# Altium PCB PCB11.ST_LINK Lyalina Veronika.PcbDoc
Units mm, origin at the board's own origin, x right, y up, seen from the top; angles counter-clockwise.
Board outline 124.21 x 96.27 mm, 2 copper layers (Top Layer, Bottom Layer); 68 components, 53 nets, 201 pads, 16 vias.
Unrouted connection lines stored in the file: 23.
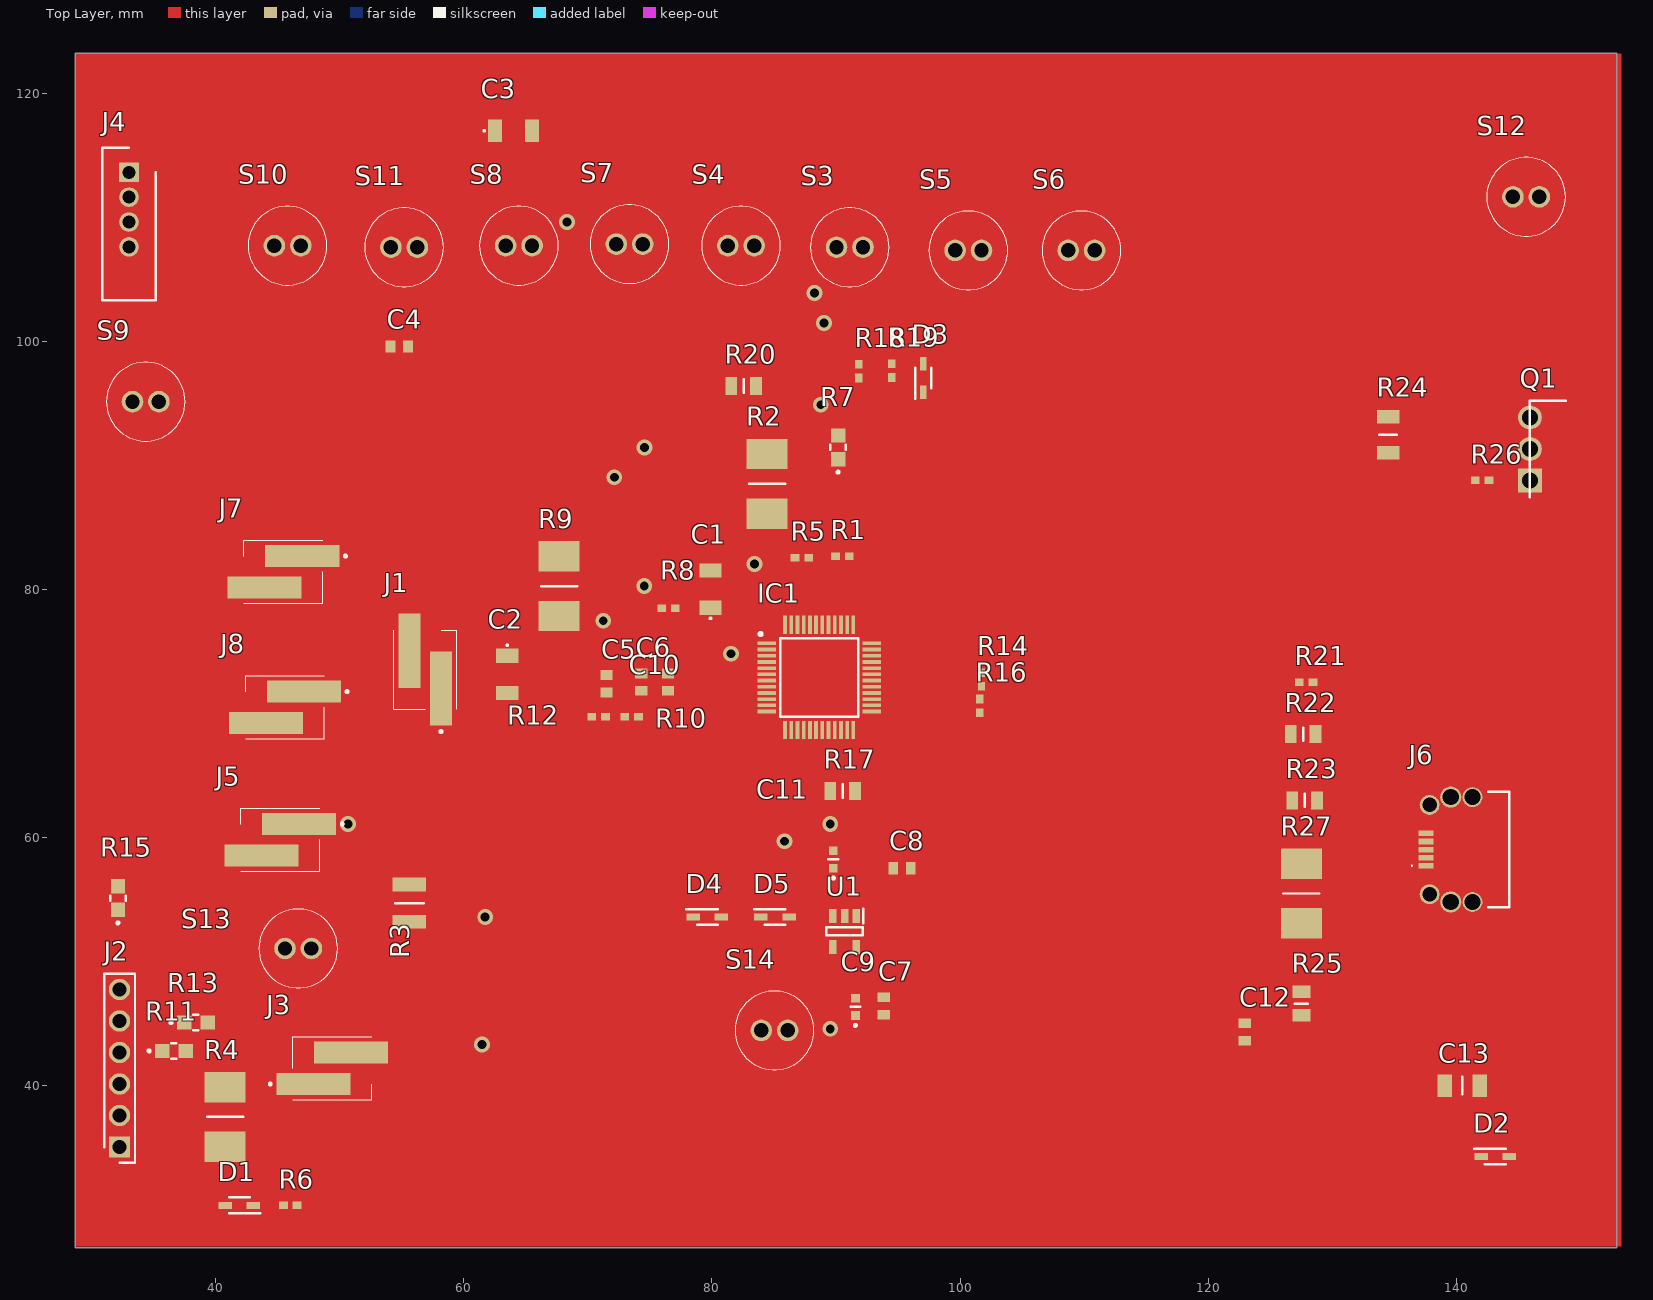
[diagram p0: Top Layer view]
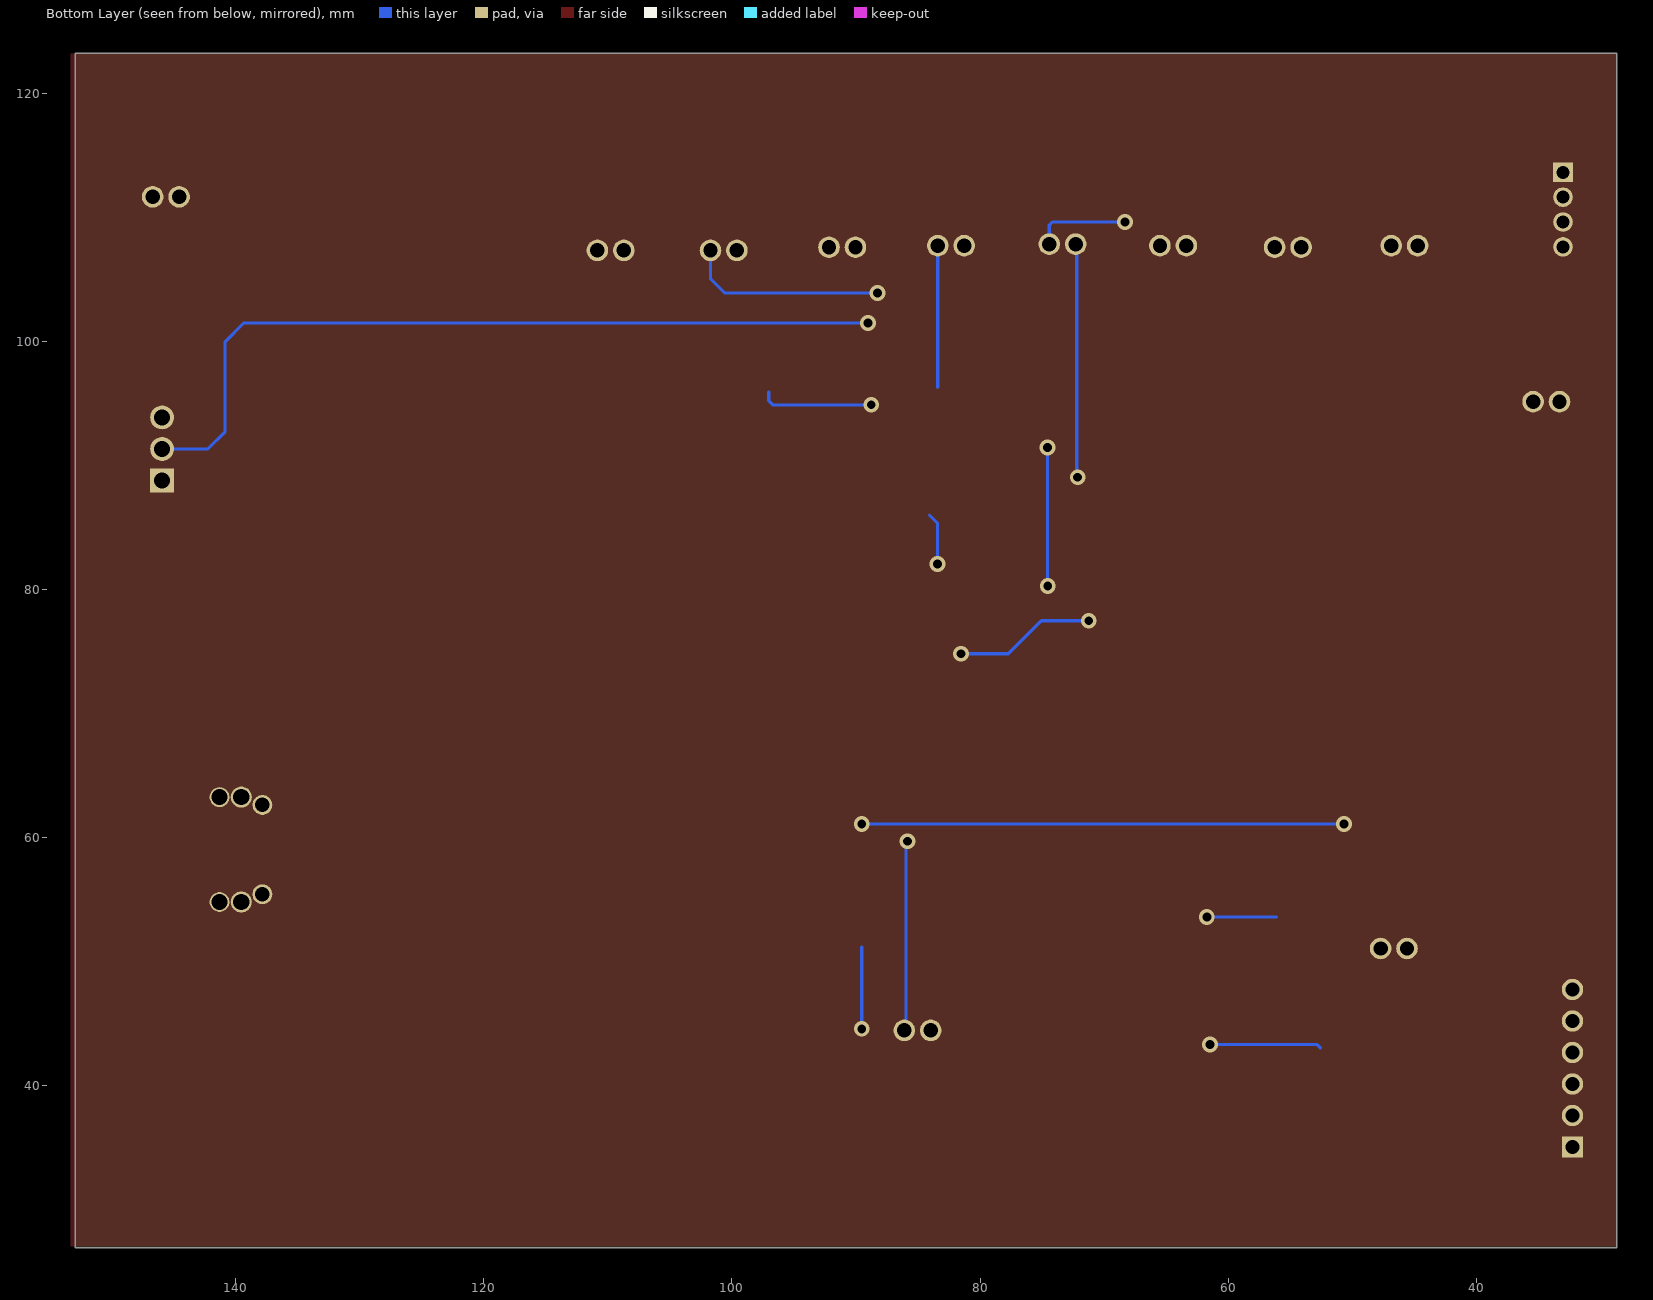
[diagram p1: Bottom Layer view, seen from below]
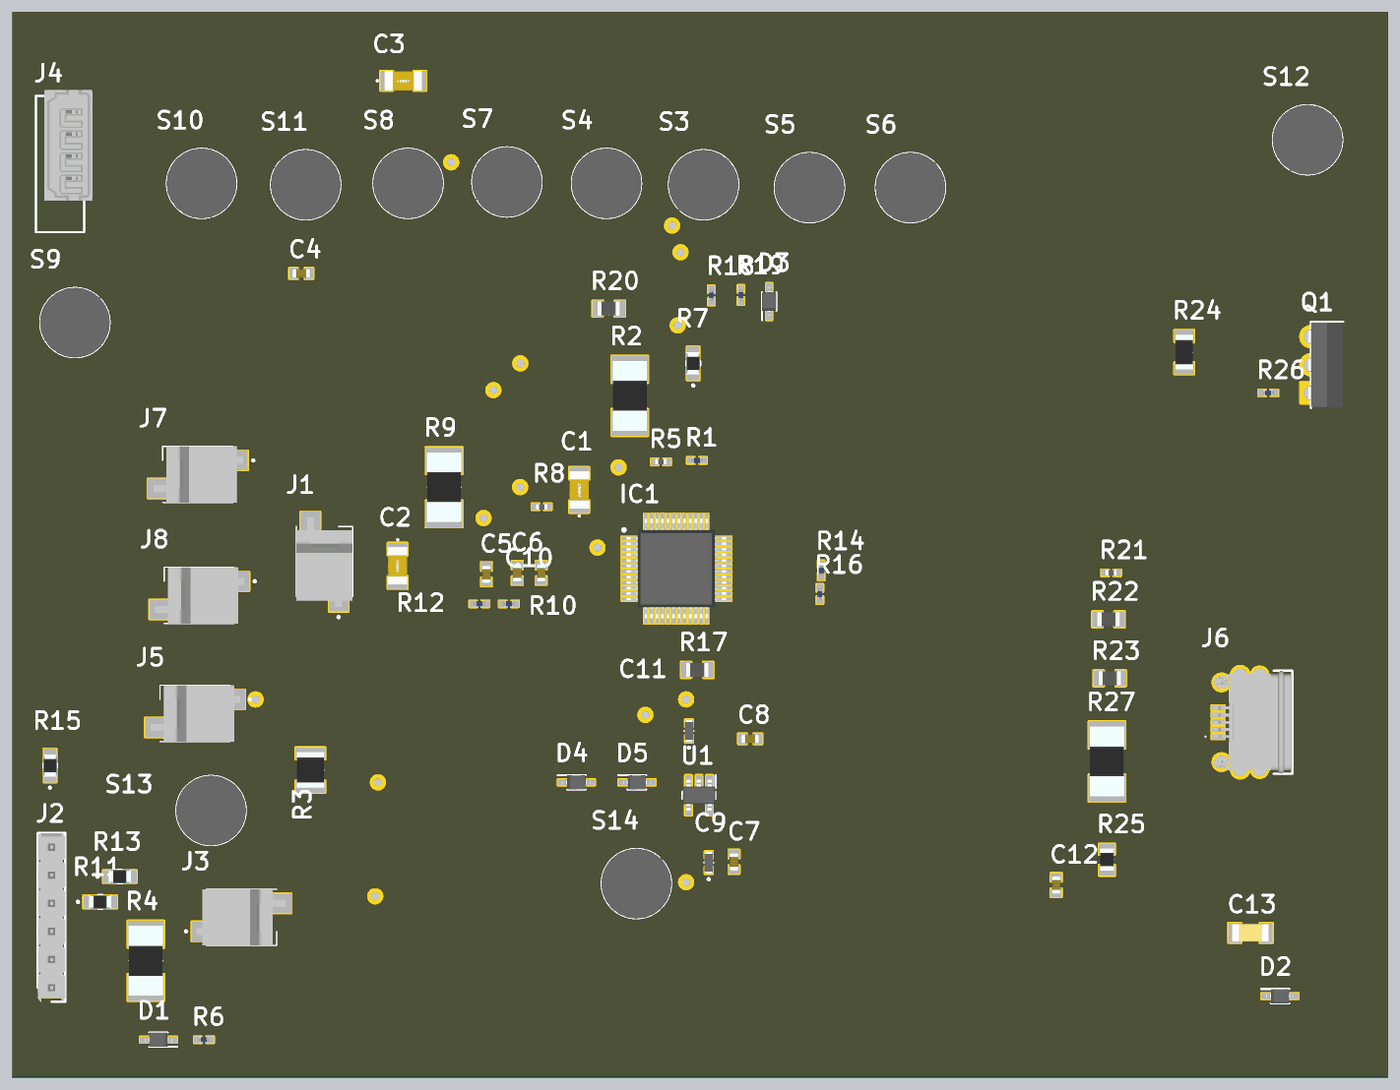
[diagram p2: 3D render of the assembled board from above, using the file's embedded part models]

## Layer stack, top to bottom
Top Solder: solder mask 0.0102, Solder Resist, Dk 3.5
Top Layer: signal copper 0.0356
Dielectric 1: dielectric 0.32, FR-4, Dk 4.8
Bottom Layer: signal copper 0.0356
Bottom Solder: solder mask 0.0102, Solder Resist, Dk 3.5

## Board outline
28.702,26.924 28.702,123.19 152.908,123.19 152.908,26.924

## Design rules (kind name [scope] priority, off if disabled: settings)
Clearance [All] p1: gap=0.254 ignorepadtopadclearanceinfootprint=FALSE
PolygonConnect [All] p1: connectstyle=Relief reliefconductorwidth=0.254 reliefentries=4 polygonreliefangle="90 Angle" airgapwidth=0.254
RoutingVias [All] p1: holewidth=0.711 width=1.27 viastyle="Through Hole" minholewidth=0.711 minwidth=1.27 maxholewidth=0.711 maxwidth=1.27
SolderMaskExpansion [All] p1: expansion=0.102 istentingtop=FALSE
Width [All] p1: maxlimit=0.254 minlimit=0.254 preferedwidth=0.254
30 further rules are at their usual default settings.

## Components (designator, comment, footprint, x,y, rotation, side; value= is the part's Value field where it differs from the comment)
C1 "C1206C200KCGACTU" C1206 79.883,80.01 r90 top
C2 "C1206C200KCGACTU" C1206 63.5,73.152 r270 top
C3 "C1206C200KCGACTU" C1206 64.008,116.967 r0 top
C4 "06035C104K4T4A" CAPC1608X90N 54.799,99.568 r0 top
C5 "06035C104K4T4A" CAPC1608X90N 71.501,72.39 r270 top
C6 "06035C104K4T4A" CAPC1608X90N 74.295,72.517 r270 top
C7 "06035C104K4T4A" CAPC1608X90N 93.853,46.417 r90 top
C8 "06035C104K4T4A" CAPC1608X90N 95.315,57.531 r0 top
C9 "MAJCT168BB7105KTEA01" MAJx16 91.567,46.355 r90 top
C10 "06035C104K4T4A" CAPC1608X90N 76.454,72.517 r270 top
C11 "MAJCT168BB7105KTEA01" MAJx16 89.789,58.231 r90 top
C12 "06035C104K4T4A" CAPC1608X90N 122.936,44.323 r90 top
C13 "KGM31GCG2J103JU" CAPC3316X145N 140.462,40.005 r0 top
D1 "BAT60JFILM" SOD2513X117N 41.91,30.353 r180 top
D2 "BAT60JFILM" SOD2513X117N 143.129,34.29 r0 top
D3 "BAT60JFILM" SOD2513X117N 97.028,97.028 r90 top
D4 "BAT60JFILM" SOD2513X117N 79.629,53.594 r0 top
D5 "BAT60JFILM" SOD2513X117N 85.087,53.594 r0 top
IC1 "STM32F103CBT6" QFP50P900X900X160-48N 88.646,72.898 r0 top
J1 "3-647166-2" 36471662 56.896,73.529 r0 top
J2 "22-28-4062" HDRV6W66P0X254_1X6_1524X249X838P 32.258,35.052 r90 top
J3 "3-647166-2" 36471662 49.403,41.402 r270 top
J4 "53014-0410" SHDR4W60P0X200_1X4_1200X435X1000P 33.02,113.601 r90 top
J5 "3-647166-2" 36471662 45.208,59.817 r90 top
J6 "204926-1103" 2049261103 140.766,59.025 r90 top
J7 "3-647166-2" 36471662 45.462,81.407 r90 top
J8 "3-647166-2" 36471662 45.593,70.485 r90 top
Q1 "BD139" TO254P290X760X1320-3P 145.923,88.773 r90 top
R1 "MCS04020D4701BE000" RESC1005X37N 90.509,82.677 r180 top
R2 "CRM2512QJW-103ELF" RESC6331X80N 84.455,88.506 r270 top
R3 "CRCW12102K70FKEAHP" RESC3225X70N 55.626,54.713 r90 top
R4 "CRM2512QJW-103ELF" RESC6331X80N 40.767,37.478 r90 top
R5 "SFR01MZPF1003" RESC1005X40N 87.249,82.55 r0 top
R6 "MCS04020C1000FE000" RESC1005X37N 46.016,30.353 r0 top
R7 "ERA-6AHD220V" ERA6AEB1020V 90.17,91.44 r90 top
R8 "SFR01MZPF1003" RESC1005X40N 76.496,78.486 r180 top
R9 "CRM2512QJW-103ELF" RESC6331X80N 67.691,80.251 r270 top
R10 "MCS04020D4701BE000" RESC1005X37N 73.533,69.723 r180 top
R11 "ERA-6AHD220V" ERA6AEB1020V 36.642,42.799 r0 top
R12 "MCS04020D4701BE000" RESC1005X37N 70.866,69.723 r0 top
R13 "ERA-6AHD220V" ERA6AEB1020V 38.415,45.085 r0 top
R14 "MCS04020C1000FE000" RESC1005X37N 101.727,72.729 r90 top
R15 "ERA-6AHD220V" ERA6AEB1020V 32.131,55.118 r90 top
R16 "MCS04020C1000FE000" RESC1005X37N 101.6,70.612 r90 top
R17 "WSL080500000ZEA9" RESC2013X84N 90.535,63.754 r0 top
R18 "MCS04020C1000FE000" RESC1005X37N 91.821,97.578 r90 top
R19 "MCS04020C1000FE000" RESC1005X37N 94.488,97.621 r90 top
R20 "WSL080500000ZEA9" RESC2013X84N 82.55,96.393 r0 top
R21 "SFR01MZPF1003" RESC1005X40N 127.889,72.517 r0 top
R22 "WSL080500000ZEA9" RESC2013X84N 127.651,68.326 r0 top
R23 "WSL080500000ZEA9" RESC2013X84N 127.762,62.992 r0 top
R24 "CRCW12061K50FKEAHP" RESC3116X65N 134.493,92.456 r90 top
R25 "TNPW080536K0BEEA" RESC2012X55N 127.508,46.609 r90 top
R26 "MCS04020C1000FE000" RESC1005X37N 142.071,88.773 r180 top
R27 "CRM2512QJW-103ELF" RESC6331X80N 127.508,55.486 r270 top
S3 "8631CQD2" 8631CQD2 90.043,107.569 r0 top
S4 "8631CQD2" 8631CQD2 81.28,107.696 r0 top
S5 "8631CQD2" 8631CQD2 99.597,107.315 r0 top
S6 "8631CQD2" 8631CQD2 108.712,107.315 r0 top
S7 "8631CQD2" 8631CQD2 72.292,107.823 r0 top
S8 "8631CQD2" 8631CQD2 63.373,107.696 r0 top
S9 "8631CQD2" 8631CQD2 35.433,95.123 r180 top
S10 "8631CQD2" 8631CQD2 44.733,107.696 r0 top
S11 "8631CQD2" 8631CQD2 54.131,107.569 r0 top
S12 "8631CQD2" 8631CQD2 144.555,111.633 r0 top
S13 "8631CQD2" 8631CQD2 45.593,51.054 r0 top
S14 "8631CQD2" 8631CQD2 83.976,44.45 r0 top
U1 "LD3985M33R" SOT95P280X145-5N 90.687,52.43 r270 top

## Footprints (in the part's own frame and the unit in brackets; to place one, negate y for a bottom-side part, rotate by r counter-clockwise, add the part's x,y. Pads: shape width x height; smd on the part's side, far side on the other; paste and mask are expansions set on the pad)
8631CQD2 [mm]
  round 1.74 hole 1.16: 1(0,0) 2(2.13,0)
  silkscreen extent -2.11,-3.17 4.24,3.17, body extent -2.11,-3.17 4.24,3.17, height 14.03
36471662 [mm]
  rect 1.78x5.97 smd: 1(1.27,-1.52) 2(-1.27,1.52)
  silkscreen extent -2.54,-5.1 2.54,3.17, body extent -2.54,-4.08 2.54,4, height 10.55
2049261103 [mm]
  rect 0.45x1.2 smd: 1(-1.3,3.225) 2(-0.65,3.225) 3(0,3.225) 4(0.65,3.225) 5(1.3,3.225)
  round 1.6 hole 1.17: MH1(-3.6,2.925) MH2(3.6,2.925)
  round 1.7 hole 1.3: MH3(-4.225,1.225) MH4(4.225,1.225)
  round 1.6 hole 1.3: MH5(-4.225,-0.525) MH6(4.225,-0.525)
  silkscreen extent -4.65,-3.47 4.65,4.4, body extent -4.65,-3.32 4.65,3.68, height 3.83
C1206 [mm]
  rect 1.15x1.8 smd: 1(-1.5,0) 2(1.5,0)
  silkscreen extent -2.4,-0.05 -2.3,0.05, body extent -1.7,-0.9 1.7,0.9, height 1.75
CAPC1608X90N [mm]
  rect 0.78x0.99 smd: 1(-0.7,0) 2(0.7,0)
  body extent -0.8,-0.41 0.8,0.41, height 0.9
CAPC3316X145N [mm]
  rect 1.17x1.82 smd: 1(-1.42,0) 2(1.42,0)
  silkscreen extent 0,-0.7 0,0.7, body extent -1.65,-0.8 1.65,0.8, height 1.68
ERA6AEB1020V [mm]
  rect 1.15x1.15 smd: 1(-0.95,0) 2(0.95,0)
  silkscreen extent -2.1,-0.63 0.2,0.63, body extent -1,-0.63 1,0.63, height 0.5
HDRV6W66P0X254_1X6_1524X249X838P [mm]
  rect 1.725x1.725 hole 1.15: 1(0,0)
  round 1.725 hole 1.15: 2(2.54,0) 3(5.08,0) 4(7.62,0) 5(10.16,0) 6(12.7,0)
  silkscreen extent -1.27,-1.24 13.97,1.24, body extent -1.27,-1.24 13.97,1.24, height 9.65
MAJx16 [mm]
  rect 0.7x0.7 smd: 1(-0.7,0) 2(0.7,0)
  silkscreen extent -1.6,-0.4 0,0.4, body extent -0.98,-0.4 0.98,0.4, height 0.9
QFP50P900X900X160-48N [mm]
  rect 1.475x0.3 smd: 1(-4.238,2.75) 2(-4.238,2.25) 3(-4.238,1.75) 4(-4.238,1.25) 5(-4.238,0.75) 6(-4.238,0.25) 7(-4.238,-0.25) 8(-4.238,-0.75) 9(-4.238,-1.25) 10(-4.238,-1.75) 11(-4.238,-2.25) 12(-4.238,-2.75) 25(4.238,-2.75) 26(4.238,-2.25) 27(4.238,-1.75) 28(4.238,-1.25) 29(4.238,-0.75) 30(4.238,-0.25) 31(4.238,0.25) 32(4.238,0.75) 33(4.238,1.25) 34(4.238,1.75) 35(4.238,2.25) 36(4.238,2.75)
  rect 0.3x1.475 smd: 13(-2.75,-4.238) 14(-2.25,-4.238) 15(-1.75,-4.238) 16(-1.25,-4.238) 17(-0.75,-4.238) 18(-0.25,-4.238) 19(0.25,-4.238) 20(0.75,-4.238) 21(1.25,-4.238) 22(1.75,-4.238) 23(2.25,-4.238) 24(2.75,-4.238) 37(2.75,4.238) 38(2.25,4.238) 39(1.75,4.238) 40(1.25,4.238) 41(0.75,4.238) 42(0.25,4.238) 43(-0.25,4.238) 44(-0.75,4.238) 45(-1.25,4.238) 46(-1.75,4.238) 47(-2.25,4.238) 48(-2.75,4.238)
  silkscreen extent -4.85,-3.15 3.15,3.62, body extent -4.5,-4.5 4.5,4.5, height 1.6
RESC1005X37N [mm]
  rect 0.7x0.6 smd: 1(-0.55,0) 2(0.55,0)
  body extent -0.5,-0.25 0.5,0.25, height 0.32
RESC1005X40N [mm]
  rect 0.7x0.6 smd: 1(-0.55,0) 2(0.55,0)
  body extent -0.5,-0.25 0.5,0.25, height 0.4
RESC2012X55N [mm]
  rect 1x1.45 smd: 1(-0.95,0) 2(0.95,0)
  silkscreen extent 0,-0.53 0,0.53, body extent -1,-0.63 1,0.63, height 0.55
RESC2013X84N [mm]
  rect 0.95x1.45 smd: 1(-1,0) 2(1,0)
  silkscreen extent 0,-0.54 0,0.54, body extent -1.01,-0.64 1.01,0.64, height 0.36
RESC3116X65N [mm]
  rect 1.1x1.8 smd: 1(-1.45,0) 2(1.45,0)
  silkscreen extent 0,-0.7 0,0.7, body extent -1.55,-0.8 1.55,0.8, height 0.65
RESC3225X70N [mm]
  rect 1.1x2.7 smd: 1(-1.5,0) 2(1.5,0)
  silkscreen extent 0,-1.15 0,1.15, body extent -1.6,-1.25 1.6,1.25, height 0.7
RESC6331X80N [mm]
  rect 2.45x3.3 smd: 1(-2.4,0) 2(2.4,0)
  silkscreen extent 0,-1.45 0,1.45, body extent -3.15,-1.55 3.15,1.55, height 0.8
SHDR4W60P0X200_1X4_1200X435X1000P [mm]
  rect 1.575x1.575 hole 1.05: 1(0,0)
  round 1.575 hole 1.05: 2(-2,0) 3(-4,0) 4(-6,0)
  silkscreen extent -10.3,-2.17 2,2.17, body extent -7.45,-2.96 2.55,1.39, height 5.85
SOD2513X117N [mm]
  rect 1.085x0.55 smd: 1(-1.14,0) 2(1.14,0)
  silkscreen extent -1.68,-0.64 0.83,0.64, body extent -1.25,-0.64 1.25,0.64, height 1.17
SOT95P280X145-5N [mm]
  rect 1.15x0.6 smd: 1(-1.25,0.95) 2(-1.25,0) 3(-1.25,-0.95) 4(1.25,-0.95) 5(1.25,0.95)
  silkscreen extent -1.83,-1.48 0.33,1.5, body extent -1.4,-1.48 1.4,1.48, height 1.45
TO254P290X760X1320-3P [mm]
  rect 1.92x1.92 hole 1.28: 1(0,0)
  round 1.92 hole 1.28: 2(2.54,0) 3(5.08,0)
  silkscreen extent -1.36,-2.9 6.44,0, body extent -1.26,-2.9 6.34,0.26, height 12.92

## Part data
C1 C2 C3: "Capacitor", Manufacturer_Name=KEMET, Datasheet Link=https://content.kemet.com/datasheets/KEM_C1009_C0G_HV_SMD.pdf, Manufacturer_Part_Number=C1206C200KCGACTU
C4 C5 C6 C7 C8 C10 C12: "Capacitor", Manufacturer_Name="Kyocera AVX", Mouser Part Number=581-06035C104K4T4A, Arrow Part Number=06035C104K4T4A, Arrow Price/Stock=https://www.arrow.com/en/products/06035c104k4t4a/avx, Datasheet Link=https://componentsearchengine.com/Datasheets/1/06031A100FAT2A.pdf, Height=0.9mm, Manufacturer_Part_Number=06035C104K4T4A, Mouser Price/Stock=https://www.mouser.co.uk/ProductDetail/KYOCERA-AVX/06035C104K4T4A?qs=NBj5Hwer2CEXBYKT%252BbuSBA%3D%3D
C9 C11: "Capacitor", Manufacturer_Name="TAIYO YUDEN", Datasheet Link=https://ds.yuden.co.jp/TYCOMPAS/or/detail?pn=MAJCT168BB7105KTEA01, Height=0.8mm, Manufacturer_Part_Number=MAJCT168BB7105KTEA01
C13: "Capacitor", Manufacturer_Name="Kyocera AVX", Mouser Part Number=581-KGM31GCG2J103JU, Datasheet Link=https://datasheets.kyocera-avx.com/HVKGM.pdf, Height=1.45mm, Manufacturer_Part_Number=KGM31GCG2J103JU, Mouser Price/Stock=https://www.mouser.co.uk/ProductDetail/KYOCERA-AVX/KGM31GCG2J103JU?qs=63Lh8XYXgjt6ivbLeGkCxg%3D%3D
D1 D2 D3 D4 D5: "Schottky Diode", Manufacturer_Name=STMicroelectronics, Mouser Part Number=511-BAT60JFILM, Arrow Part Number=BAT60JFILM, Arrow Price/Stock=https://www.arrow.com/en/products/bat60jfilm/stmicroelectronics?region=nac, Datasheet Link=https://www.mouser.jp/datasheet/2/389/cd00001944-1795661.pdf, Height=1.17mm, Manufacturer_Part_Number=BAT60JFILM, Mouser Price/Stock=https://www.mouser.co.uk/ProductDetail/STMicroelectronics/BAT60JFILM?qs=GnFZssByvVVVnMaukcyLZg%3D%3D
IC1: "Integrated Circuit", Manufacturer_Name=STMicroelectronics, Mouser Part Number=511-STM32F103CBT6, Arrow Part Number=STM32F103CBT6, Arrow Price/Stock=https://www.arrow.com/en/products/stm32f103cbt6/stmicroelectronics?region=europe, Datasheet Link=http://www.st.com/st-web-ui/static/active/en/resource/technical/document/datasheet/CD00161566.pdf, Height=1.6mm, Manufacturer_Part_Number=STM32F103CBT6, Mouser Price/Stock=https://www.mouser.co.uk/ProductDetail/STMicroelectronics/STM32F103CBT6?qs=WxFF5lh7QM3goh6GV5Ogig%3D%3D
J1 J3 J5 J7 J8: "Connector", Manufacturer_Name="TE Connectivity", Mouser Part Number=571-3-647166-2, Arrow Part Number=3-647166-2, Arrow Price/Stock=https://www.arrow.com/en/products/3-647166-2/te-connectivity?region=nac, Datasheet Link=https://www.te.com/commerce/DocumentDelivery/DDEController?Action=showdoc&DocId=Customer+Drawing%7F647166%7FR1%7Fpdf%7FEnglish%7FENG_CD_647166_R1.pdf%7F3-647166-2, Height=10.66mm, Manufacturer_Part_Number=3-647166-2, Mouser Price/Stock=https://www.mouser.co.uk/ProductDetail/TE-Connectivity/3-647166-2?qs=xsTFCgGnzbJU1qz6Np9kzA%3D%3D
J2: "Connector", Manufacturer_Name=Molex, Mouser Part Number=538-22-28-4062, Datasheet Link=https://datasheet.datasheetarchive.com/originals/distributors/SFDatasheet-1/sf-00031037.pdf, Height=8.38mm, Manufacturer_Part_Number=22-28-4062, Mouser Price/Stock=https://www.mouser.com/Search/Refine.aspx?Keyword=538-22-28-4062
J4: "Connector", Manufacturer_Name=Molex, Mouser Part Number=538-53014-0410, Datasheet Link=https://www.molex.com/pdm_docs/sd/530140410_sd.pdf, Height=10mm, Manufacturer_Part_Number=53014-0410, Mouser Price/Stock=https://www.mouser.co.uk/ProductDetail/Molex/53014-0410?qs=TLs3Kb%252BkMqKk8s1WRHwRGw%3D%3D
J6: "Connector", Manufacturer_Name=Molex, Mouser Part Number=538-204926-1103, Arrow Part Number=204926-1103, Arrow Price/Stock=https://www.arrow.com/en/products/204926-1103/molex?region=nac, Datasheet Link=https://www.molex.com/content/dam/molex/molex-dot-com/products/automated/en-us/salesdrawingpdf/204/204926/2049261103_sd.pdf, Height=4.65mm, Manufacturer_Part_Number=204926-1103, Mouser Price/Stock=https://www.mouser.co.uk/ProductDetail/Molex/204926-1103?qs=55YtniHzbhBOQihiQOeiLg%3D%3D
Q1: "Transistor BJT NPN", Manufacturer_Name=STMicroelectronics, Mouser Part Number=511-BD139, Arrow Part Number=BD139, Arrow Price/Stock=https://www.arrow.com/en/products/bd139/stmicroelectronics?region=europe, Datasheet Link=http://www.st.com/web/en/resource/technical/document/datasheet/CD00001225.pdf, Height=2.9mm, Manufacturer_Part_Number=BD139, Mouser Price/Stock=https://www.mouser.co.uk/ProductDetail/STMicroelectronics/BD139?qs=ljbEvF4DwOPW%2FLxHSWYMMA%3D%3D
R1 R10 R12: "Resistor", Manufacturer_Name=Vishay, Mouser Part Number=594-MCS04020D4701BE0, Datasheet Link=http://www.vishay.com/docs/28705/mcx0x0xpro.pdf, Height=0.37mm, Manufacturer_Part_Number=MCS04020D4701BE000, Mouser Price/Stock=https://www.mouser.co.uk/ProductDetail/Vishay-Beyschlag/MCS04020D4701BE000?qs=ft9OtscSA3%252BR0DpF5QqL2Q%3D%3D
R2 R4 R9 R27: "Resistor", Manufacturer_Name=Bourns, Mouser Part Number=652-CRM2512QJW-103E, Arrow Part Number=CRM2512QJW-103ELF, Arrow Price/Stock=https://www.arrow.com/en/products/crm2512qjw-103elf/bourns?region=nac, Datasheet Link=http://www.bourns.com/data/global/pdfs/CRM0805_1206_2010.pdf, Height=0.8mm, Manufacturer_Part_Number=CRM2512QJW-103ELF, Mouser Price/Stock=https://www.mouser.co.uk/ProductDetail/Bourns/CRM2512QJW-103ELF?qs=8Wlm6%252BaMh8Rzg3bRHdWGsA%3D%3D
R3: "Resistor", Manufacturer_Name=Vishay, Mouser Part Number=71-CRCW12102K70FKEAH, Datasheet Link=http://componentsearchengine.com/Datasheets/1/CRCW12102K70FKEAHP.pdf, Height=0.7mm, Manufacturer_Part_Number=CRCW12102K70FKEAHP, Mouser Price/Stock=https://www.mouser.co.uk/ProductDetail/Vishay-Dale/CRCW12102K70FKEAHP?qs=OAzHGkhREL0m0%252BU1n6AaAg%3D%3D
R5 R8 R21: "Resistor", Manufacturer_Name="ROHM Semiconductor", Mouser Part Number=755-SFR01MZPF1003, Datasheet Link=https://fscdn.rohm.com/en/products/databook/datasheet/passive/resistor/chip_resistor/sfr-e.pdf, Height=0.4mm, Manufacturer_Part_Number=SFR01MZPF1003, Mouser Price/Stock=https://www.mouser.co.uk/ProductDetail/ROHM-Semiconductor/SFR01MZPF1003?qs=Mv7BduZupUj2RFL5gMaKTg%3D%3D
R6 R14 R16 R18 R19 R26: "Resistor", Manufacturer_Name=Vishay, Mouser Part Number=594-MCS04020C1000FE0, Arrow Part Number=MCS04020C1000FE000, Arrow Price/Stock=https://www.arrow.com/en/products/mcs04020c1000fe000/vishay, Datasheet Link=http://www.vishay.com/docs/28705/mcx0x0xpro.pdf, Height=0.37mm, Manufacturer_Part_Number=MCS04020C1000FE000, Mouser Price/Stock=https://www.mouser.co.uk/ProductDetail/Vishay-Beyschlag/MCS04020C1000FE000?qs=7ZE6F4QMOBYkwvQlfbkT8w%3D%3D
R7 R11 R13 R15: "Resistor", Manufacturer_Name=Panasonic, Mouser Part Number=667-ERA-6AHD220V, Datasheet Link=https://industrial.panasonic.com/cdbs/www-data/pdf/RDM0000/AOA0000C307.pdf, Height=0.6mm, Manufacturer_Part_Number=ERA-6AHD220V, Mouser Price/Stock=https://www.mouser.co.uk/ProductDetail/Panasonic/ERA-6AHD220V/?qs=MNPzkKEzRtQTWqg2JSKn2A%3D%3D
R17 R20 R22 R23: "Resistor", Manufacturer_Name=Vishay, Mouser Part Number=71-WSL080500000ZEA9, Arrow Part Number=WSL080500000ZEA9, Arrow Price/Stock=https://www.arrow.com/en/products/wsl080500000zea9/vishay?region=nac, Datasheet Link=https://ad.componentsearchengine.com/Datasheets/2/WSL080500000ZEA9.pdf, Height=0.838mm, Manufacturer_Part_Number=WSL080500000ZEA9, Mouser Price/Stock=https://www.mouser.co.uk/ProductDetail/Vishay-Dale/WSL080500000ZEA9?qs=f1l5vAGoKgsImKS87N8TmQ%3D%3D
R24: "Resistor", Manufacturer_Name=Vishay, Mouser Part Number=71-CRCW12061K50FKEAH, Arrow Part Number=CRCW12061K50FKEAHP, Arrow Price/Stock=https://www.arrow.com/en/products/crcw12061k50fkeahp/vishay?region=nac, Datasheet Link=http://componentsearchengine.com/Datasheets/1/CRCW12061K50FKEAHP.pdf, Height=0.65mm, Manufacturer_Part_Number=CRCW12061K50FKEAHP, Mouser Price/Stock=https://www.mouser.co.uk/ProductDetail/Vishay-Dale/CRCW12061K50FKEAHP?qs=k2%2FDWSARqgEwHXAQbL4aEg%3D%3D
R25: "Resistor", Manufacturer_Name=Vishay, Datasheet Link=https://www.vishay.com/docs/31006/tnpw.pdf, Height=0.55mm, Manufacturer_Part_Number=TNPW080536K0BEEA
S3 S4 S5 S6 S7 S8 S9 S10 S11 S12 S13 S14: "Switch (2-Pin Push)", Manufacturer_Name="C & K COMPONENTS", Mouser Part Number=611-8631-261, Datasheet Link=https://www.ckswitches.com/media/1396/8600.pdf, Height=13.93mm, Manufacturer_Part_Number=8631CQD2, Mouser Price/Stock=https://www.mouser.co.uk/ProductDetail/CK/8631CQD2?qs=ktcBc77oICXe9iPhfEwnkA%3D%3D
U1: "Integrated Circuit", Manufacturer_Name=STMicroelectronics, Mouser Part Number=511-LD3985M33R, Arrow Part Number=LD3985M33R, Arrow Price/Stock=https://www.arrow.com/en/products/ld3985m33r/stmicroelectronics?region=europe, Datasheet Link=http://www.st.com/st-web-ui/static/active/en/resource/technical/document/datasheet/CD00003395.pdf, Height=1.45mm, Manufacturer_Part_Number=LD3985M33R, Mouser Price/Stock=https://www.mouser.co.uk/ProductDetail/STMicroelectronics/LD3985M33R?qs=22WmWNTp1rrPOccVv4HZ7A%3D%3D

## Via types
v1: diameter 1.27, hole 0.711, Top Layer to Bottom Layer, 16 vias

## Nets (pads, with @x,y where several pads share a name; then routed paths per layer and width w, separated by ;. In a path a pad name is that pad's centre, name@x,y a point inside that pad or via, vN(x,y) a via of type N, cw(c..) or ccw(c..) an arc to the next point about the centre after c; other vN are vias at no path point)
+3V3: R10.1
+3V3_ST_LINK: C5.2 C6.2 C7.2 C8.2 C9.2 C10.2 IC1.1 IC1.9 IC1.24 IC1.36 IC1.48 J1.1 Q1.2 R17.2 R20.2 S4.2 U1.5 | length 205.7
  Top Layer w0.254: J1.1 J1.1@58.166,71.459 ; 73.555,71.817 C6.2 C10.2 ; 83.482,71.648 78.125,71.648 77.597,71.12 77.597,69.977 74.676,67.056 58.674,67.056 58.166,67.564 J1.1@58.166,71.459 ; R20.2 87.503,96.393 89.027,97.917 v1@89.027,100.965 ; IC1.48 85.896,81.871 84.709,83.058 74.168,83.058 73.363,82.253 73.363,71.882 73.555,71.69 C5.2 66.356,71.69 65.362,70.696 58.929,70.696 J1.1@58.166,71.459 ; IC1.24 91.396,63.893 R17.2 91.535,60.865 93.98,58.42 95.631,58.42 96.012,58.039 96.012,57.534 C8.2 96.015,51.819 95.25,51.054 91.764,51.054 U1.5 91.602,51.145 91.602,47.09 C9.2 93.791,47.055 C7.2 ; 91.44,69.469 91.44,72.009 90.678,72.771 90.678,75.311 91.015,75.648 IC1.36
  Bottom Layer w0.254: S4.2 83.41,96.295 83.439,96.266 ; v1(89.027,101.473) 139.319,101.473 140.843,99.949 140.843,92.71 142.24,91.313 Q1.2
+3V_ST_LINK: R8.2
E5V: C11.2 C12.2 D4.1 D4.2 D5.1 D5.2 R3.1 U1.1 U1.2 U1.3 | length 76.8
  Top Layer w0.254: v1(61.722,53.594) D4.1 D4.2 D5.1 D5.2 89.651,53.594 U1.3 U1.2 U1.1 ; 87.757,53.34 87.757,48.226 91.059,44.924 C12.2@122.521,44.924
  Bottom Layer w0.254: 56.134,53.594 v1(61.722,53.594)
GND: C1.2 C2.2 C3.2 C4.1 C5.1 C6.1 C7.1 C8.1 C9.1 C10.1 C11.1 C12.1 C13.2 D2.1 D2.2 IC1.8 IC1.20 IC1.23 IC1.35 IC1.47 J2.3 J5.2 J6.5 J6.MH2 J6.MH3 J6.MH4 J6.MH5 J6.MH6 J7.1 J7.2 J8.1 J8.2 R1.2 R2.1 R4.2 R5.1 R9.1 R12.1 R18.2 R21.2 S8.2 S11.1 | length 50.3
  Top Layer w0.254: IC1.8 86.118,72.148 86.396,72.426 86.396,76.21 ; J6.5 137.166,60.325 134.88,62.611 133.096,62.611 132.207,63.5 132.207,69.088 130.429,70.866 128.8,70.866 128.439,71.227 R21.2 136.144,72.517 137.841,70.82 J6.MH2 ; C13.2 141.989,39.898 141.989,34.544 142.243,34.29 D2.2
NetC1_1: C1.1 C4.2 IC1.6 IC1.7 R8.1 S11.2 | length 63.8
  Top Layer w0.254: S11.2 56.261,100.435 55.499,99.673 C4.2 55.499,92.329 56.388,91.44 v1(74.567,91.44) ; v1(74.549,80.264) 77.046,80.264 ; R8.1 77.046,80.264 ; 77.046,80.307 77.046,80.264 ; IC1.6 84.35,73.148 83.939,73.559 83.939,73.617 80.222,73.617 79.756,74.083 79.756,78.383 C1.1 79.78,78.613 78.508,78.613 78.359,78.762 78.359,79.629 77.724,80.264 77.046,80.264
  Bottom Layer w0.254: v1@74.567,80.536 v1(74.567,91.44)
NetC2_1: C2.1 IC1.5
NetC3_1: C3.1 R14.2 S12.2 | length 172.1
  Top Layer w0.254: C3.1 62.508,115.292 63.246,114.554 72.009,114.554 72.136,114.681 112.268,114.681 114.681,112.268 114.681,73.279 ; R14.2 114.681,73.279 ; S12.2 146.685,101.219 144.272,98.806 127.381,98.806 123.063,94.488 123.063,75.819 120.523,73.279 114.681,73.279
NetC13_1: C13.1 U1.4 | length 52.9
  Top Layer w0.254: v1(89.535,44.577) 89.535,42.037 91.567,40.005 C13.1
NetD1_1: D1.1 R6.1 | length 2.4
  Top Layer w0.254: D1.1 R6.1
NetD1_2: D1.2 J2.1 R4.1 | length 13.2
  Top Layer w0.254: J2.1 40.741,35.052 R4.1 40.767,30.356 D1.2
NetD3_1: D3.1 R20.1 | length 17.2
  Top Layer w0.254: R20.1 81.55,95.361 82.064,94.847 82.274,94.847 82.296,94.869 v1@88.392,94.869
  Bottom Layer w0.254: v1(88.773,94.869) 96.647,94.869 96.669,94.847 97.028,95.206 97.028,95.885
NetD3_2: D3.2 R19.2
NetIC1_2: IC1.2 R2.2 | length 11.2
  Top Layer w0.254: v1@83.439,81.788 83.439,76.117 IC1.2
  Bottom Layer w0.254: v1(83.439,82.042) 83.439,85.344 84.074,85.979
NetIC1_3: IC1.3 R9.2 | length 17.1
  Top Layer w0.254: R9.2 68.072,77.47 v1(71.247,77.47) ; v1(81.534,74.803) 81.689,74.648 83.482,74.648
  Bottom Layer w0.254: v1(71.247,77.47) 75.057,77.47 77.724,74.803 v1(81.534,74.803)
NetIC1_10: IC1.10 R10.2 R12.2
NetIC1_12: IC1.12 J3.1 S13.2 | length 73.8
  Top Layer w0.254: S13.2 47.557,50.888 47.557,41.624 47.584,41.597 47.584,40.431 J3.1 55.753,40.132 58.293,42.672 58.293,56.134 59.436,57.277 80.01,57.277 82.55,59.817 82.55,69.723 82.975,70.148 IC1.12
NetIC1_13: IC1.13 J3.2 S14.2 | length 60.6
  Top Layer w0.254: v1(61.468,43.307) 62.103,43.307 64.008,41.402 85.344,41.402 86.106,42.164 S14.2 ; v1(85.852,59.69) 85.852,61.741 85.865,61.754 IC1.13@85.865,67.945
  Bottom Layer w0.254: 52.578,43.053 52.832,43.307 v1(61.468,43.307) ; v1(85.852,59.69) 85.979,59.563 85.979,44.577 S14.2
NetIC1_21: IC1.21 J5.1 R17.1 | length 50
  Top Layer w0.254: J5.1 v1(50.673,61.087) v1@50.927,61.087 ; v1(89.535,61.087) R17.1 89.535,67.056 89.884,67.405 89.884,67.746 ; IC1.21 89.896,68.6 IC1.21@89.916,68.58
  Bottom Layer w0.254: v1(50.673,61.087) v1(89.535,61.087)
NetIC1_25: IC1.25 R16.1 | length 8.8
  Top Layer w0.254: IC1.25 92.907,70.125 101.537,70.125 R16.1
NetIC1_27: IC1.27 R16.2 | length 8.7
  Top Layer w0.254: IC1.27 101.586,71.148 R16.2
NetIC1_28: IC1.28
NetIC1_29: IC1.29 R14.1 | length 8.9
  Top Layer w0.254: IC1.29 101.696,72.148 R14.1
NetIC1_37: IC1.37 IC1.38 IC1.39 J1.2 R1.1 R3.2 | length 6.1
  Top Layer w0.254: IC1.39 90.419,77.159 90.873,77.159 90.919,77.205 90.919,82.537 R1.1
NetIC1_44: IC1.44 R5.2 | length 5.5
  Top Layer w0.254: R5.2 87.896,82.453 IC1.44
NetJ2_2: J2.2 R7.1 | length 117.6
  Top Layer w0.254: J2.2 30.734,37.592 29.718,38.608 29.718,88.265 31.877,90.424 78.994,90.424 82.296,93.726 87.122,93.726 88.519,92.329 88.519,90.827 88.668,90.678 89.982,90.678 R7.1
NetJ2_4: J2.4 R11.1 | length 3.5
  Top Layer w0.254: J2.4 35.565,42.672 R11.1
NetJ2_5: J2.5 R13.1 | length 5.3
  Top Layer w0.254: J2.5 37.338,45.212 R13.1
NetJ2_6: J2.6 R15.1 | length 6.5
  Top Layer w0.254: R15.1 32.258,54.041 J2.6
NetJ4_1: J4.1 S3.2 S4.1 | length 71.2
  Top Layer w0.254: J4.1 81.28,113.601 ; S4.1 81.28,113.601 ; S3.2 92.329,107.725 92.329,113.452 92.18,113.601 81.28,113.601
NetJ4_2: J4.2 S5.2 S6.1 | length 84.3
  Top Layer w0.254: J4.2 68.358,111.601 69.596,110.363 69.596,105.41 71.247,103.759 v1@88.011,103.759 ; S5.2 S6.1
  Bottom Layer w0.254: v1(88.265,103.886) 100.584,103.886 101.727,105.029 S5.2
NetJ4_3: J4.3 S7.2 S8.1 | length 44.6
  Top Layer w0.254: J4.3 63.224,109.601 ; S8.1 63.373,109.452 63.224,109.601 ; v1@67.945,109.601 63.224,109.601
  Bottom Layer w0.254: v1(68.326,109.601) 74.168,109.601 74.422,109.347 S7.2
NetJ4_4: J4.4 S9.2 S10.1 | length 24.3
  Top Layer w0.254: S9.2 33.162,95.264 33.162,107.459 J4.4 33.068,107.648 44.685,107.648 S10.1
NetJ6_2: J6.2 R23.1 | length 13.3
  Top Layer w0.254: R23.1 126.762,61.96 128.841,59.88 134.81,59.88 136.316,58.375 J6.2
NetJ6_3: J6.3 R22.1 R24.1 | length 31.1
  Top Layer w0.254: R22.1 126.651,68.576 125.095,70.132 125.095,88.265 127.762,90.932 134.419,90.932 R24.1
NetJ6_4: J6.4 R21.1 | length 20.9
  Top Layer w0.254: R21.1 127.254,72.432 127.254,70.485 127.635,70.104 129.921,70.104 130.683,69.342 130.683,62.357 131.953,61.087 134.779,61.087 136.191,59.675 J6.4
NetQ1_1: Q1.1 R26.1 | length 3.3
  Top Layer w0.254: R26.1 Q1.1
NetQ1_3: Q1.3 R24.2 | length 11.5
  Top Layer w0.254: R24.2 134.546,93.853 Q1.3
NetR7_2: R7.2 S3.1 | length 15.2
  Top Layer w0.254: S3.1 90.043,92.517 R7.2
NetR11_2: R11.2 S7.1 | length 90.9
  Top Layer w0.254: R11.2 37.592,43.755 37.891,44.054 40.022,44.054 42.545,46.576 42.545,53.213 44.577,55.245 50.292,55.245 51.816,56.769 51.816,77.216 54.102,79.502 61.722,79.502 63.881,81.661 63.881,85.344 65.659,87.122 69.977,87.122 v1@71.882,89.027
  Bottom Layer w0.254: v1(72.136,89.027) 72.214,89.105 72.214,107.745 S7.1
NetR18_1: R18.1 R19.1
NetR25_1: R25.1 R27.2 | length 11.4
  Top Layer w0.254: R25.1 125.918,45.659 125.222,46.355 125.222,49.403 126.365,50.546 127.74,50.546 127.889,50.695 127.889,52.705 R27.2
NetS1_1: 
NetS2_1: 
NetS5_1: S5.1
NetS9_1: S9.1
NetS12_1: S12.1
NetS13_1: S13.1
NetS14_1: S14.1
U5V: J6.1 R27.1 | length 10.1
  Top Layer w0.254: R27.1 127.669,57.725 J6.1
"USB DM": R23.2
"USB DP": R22.2
"USB RENUMn": R26.2
pads on no net: IC1.4 IC1.11 IC1.14 IC1.15 IC1.16 IC1.17 IC1.18 IC1.19 IC1.22 IC1.26 IC1.30 IC1.31 IC1.32 IC1.33 IC1.34 IC1.40 IC1.41 IC1.42 IC1.43 IC1.45 IC1.46 J6.MH1 R6.2 R13.2 R15.2 R25.2 S6.2 S10.2
copper on no net: | length 6.6
  Bottom Layer w0.254: 89.535,44.577 89.535,47.635 89.535,51.182

## Other copper
Top Layer:
  rectangle net GND: 28.702,27.051 153.289,123.19

## Silkscreen, mask and mechanical layers (free items; w line width, h text height)
Mechanical 1:
  the board outline again, w0.254